# Altium PCB LuxLogger_V2_pcb.PcbDoc
Units mm, origin at the board's own origin, x right, y up, seen from the top; angles counter-clockwise.
Board outline 40 x 34 mm, 4 copper layers (Layer 1, Layer 2 - GND, Layer 3 - PWR, Layer 4), stack 1.57 mm thick; 83 components, 57 nets, 262 pads, 111 vias.
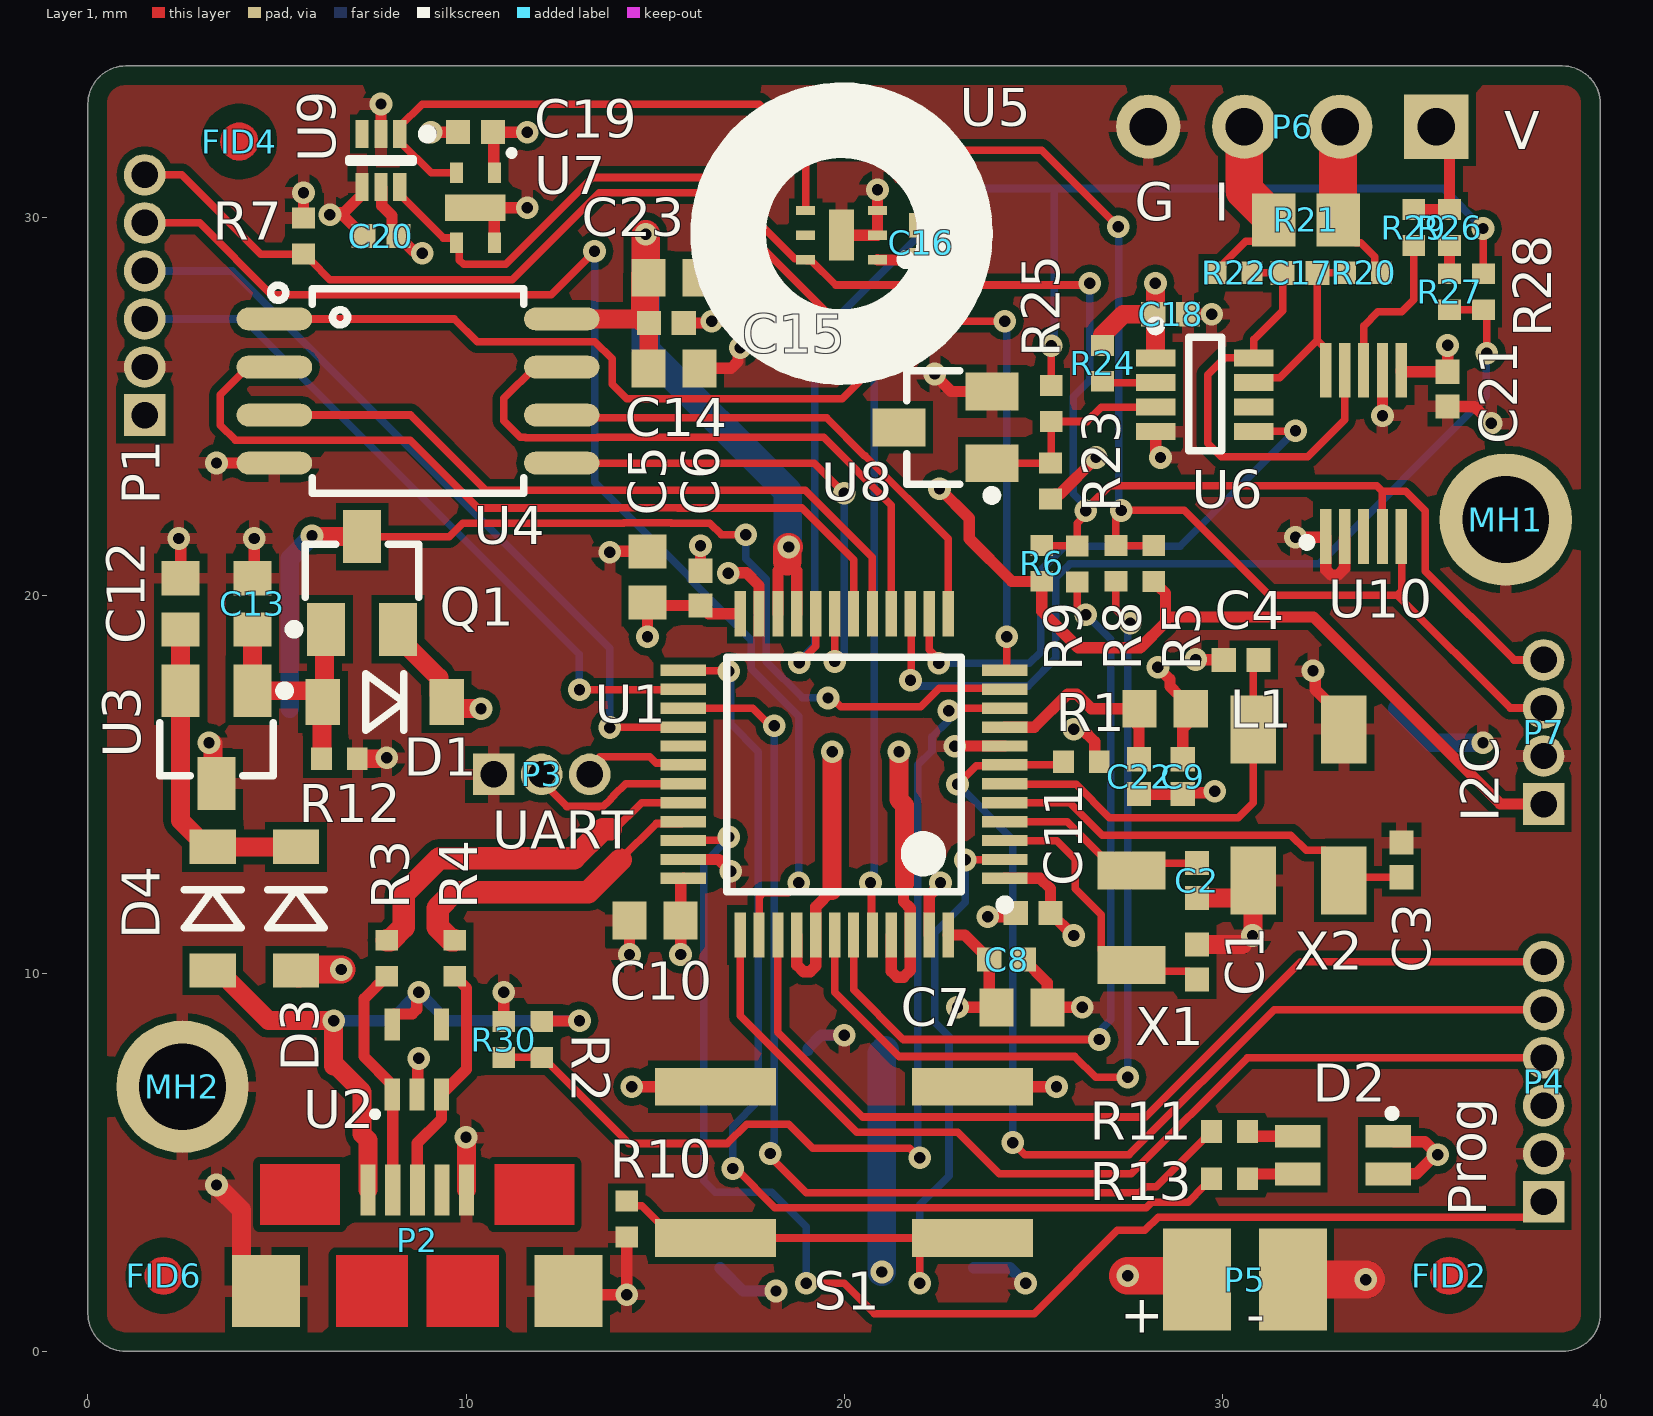
[diagram p0: Layer 1 view]
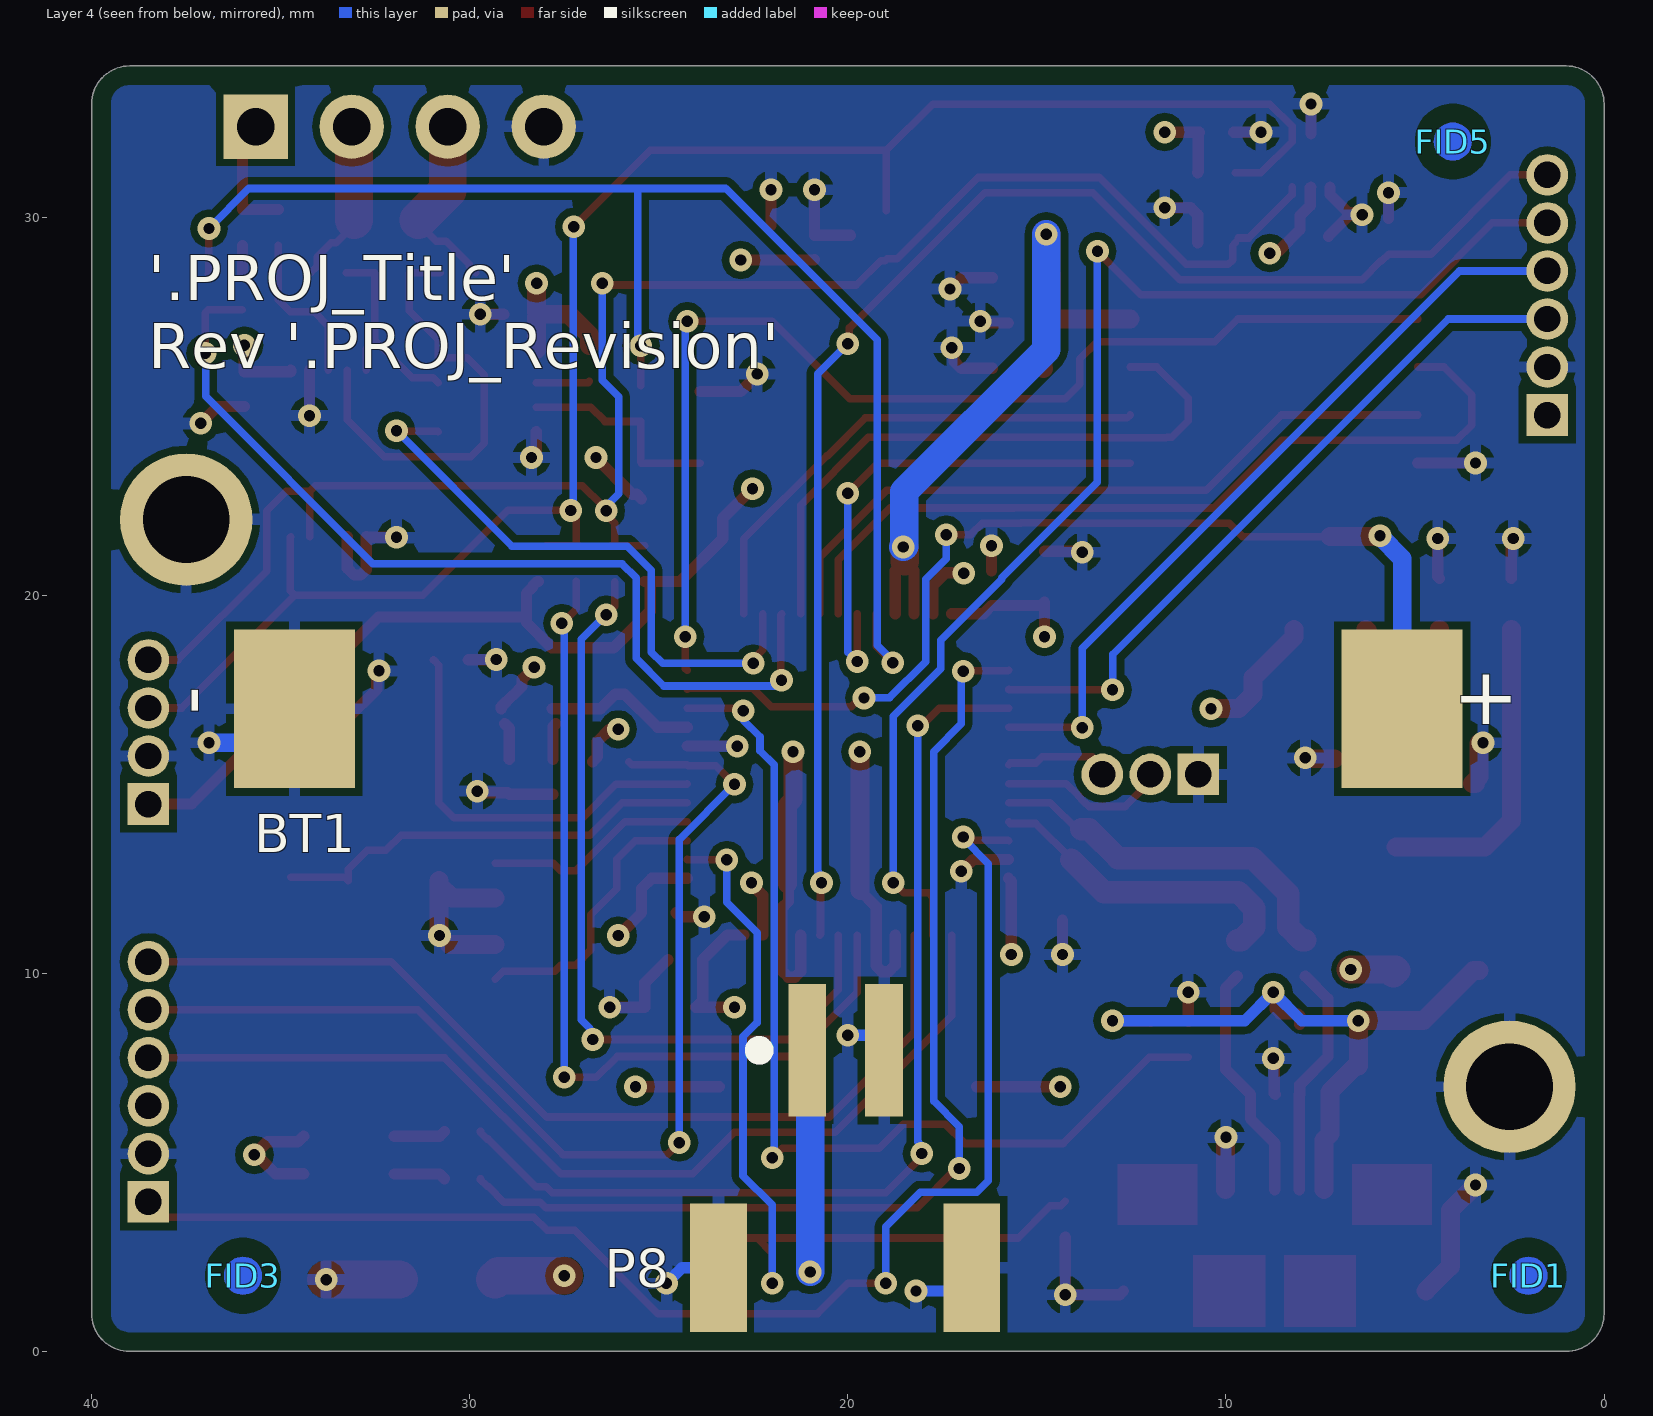
[diagram p1: Layer 4 view, seen from below]
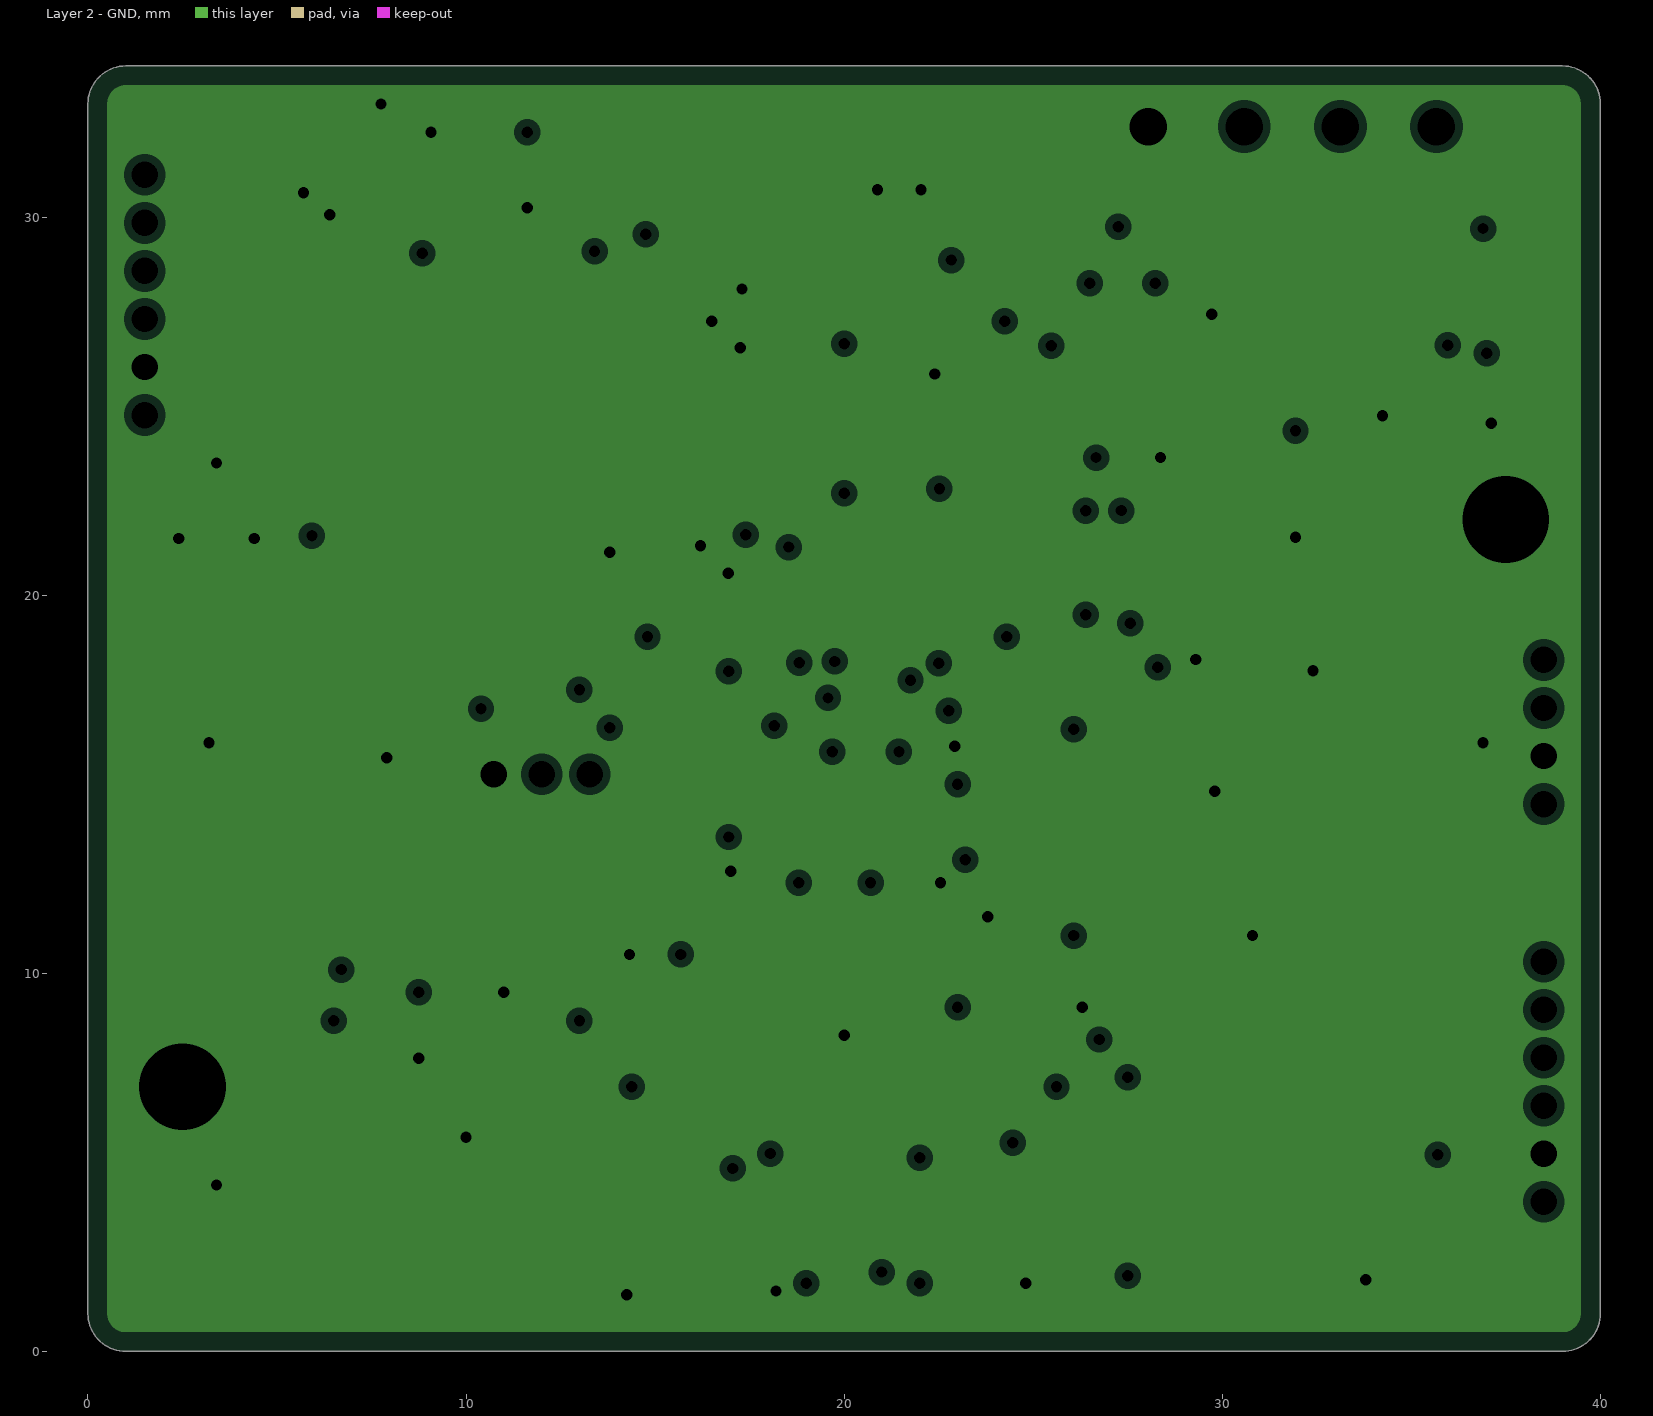
[diagram p2: Layer 2 - GND, clearances drawn from the general rule]
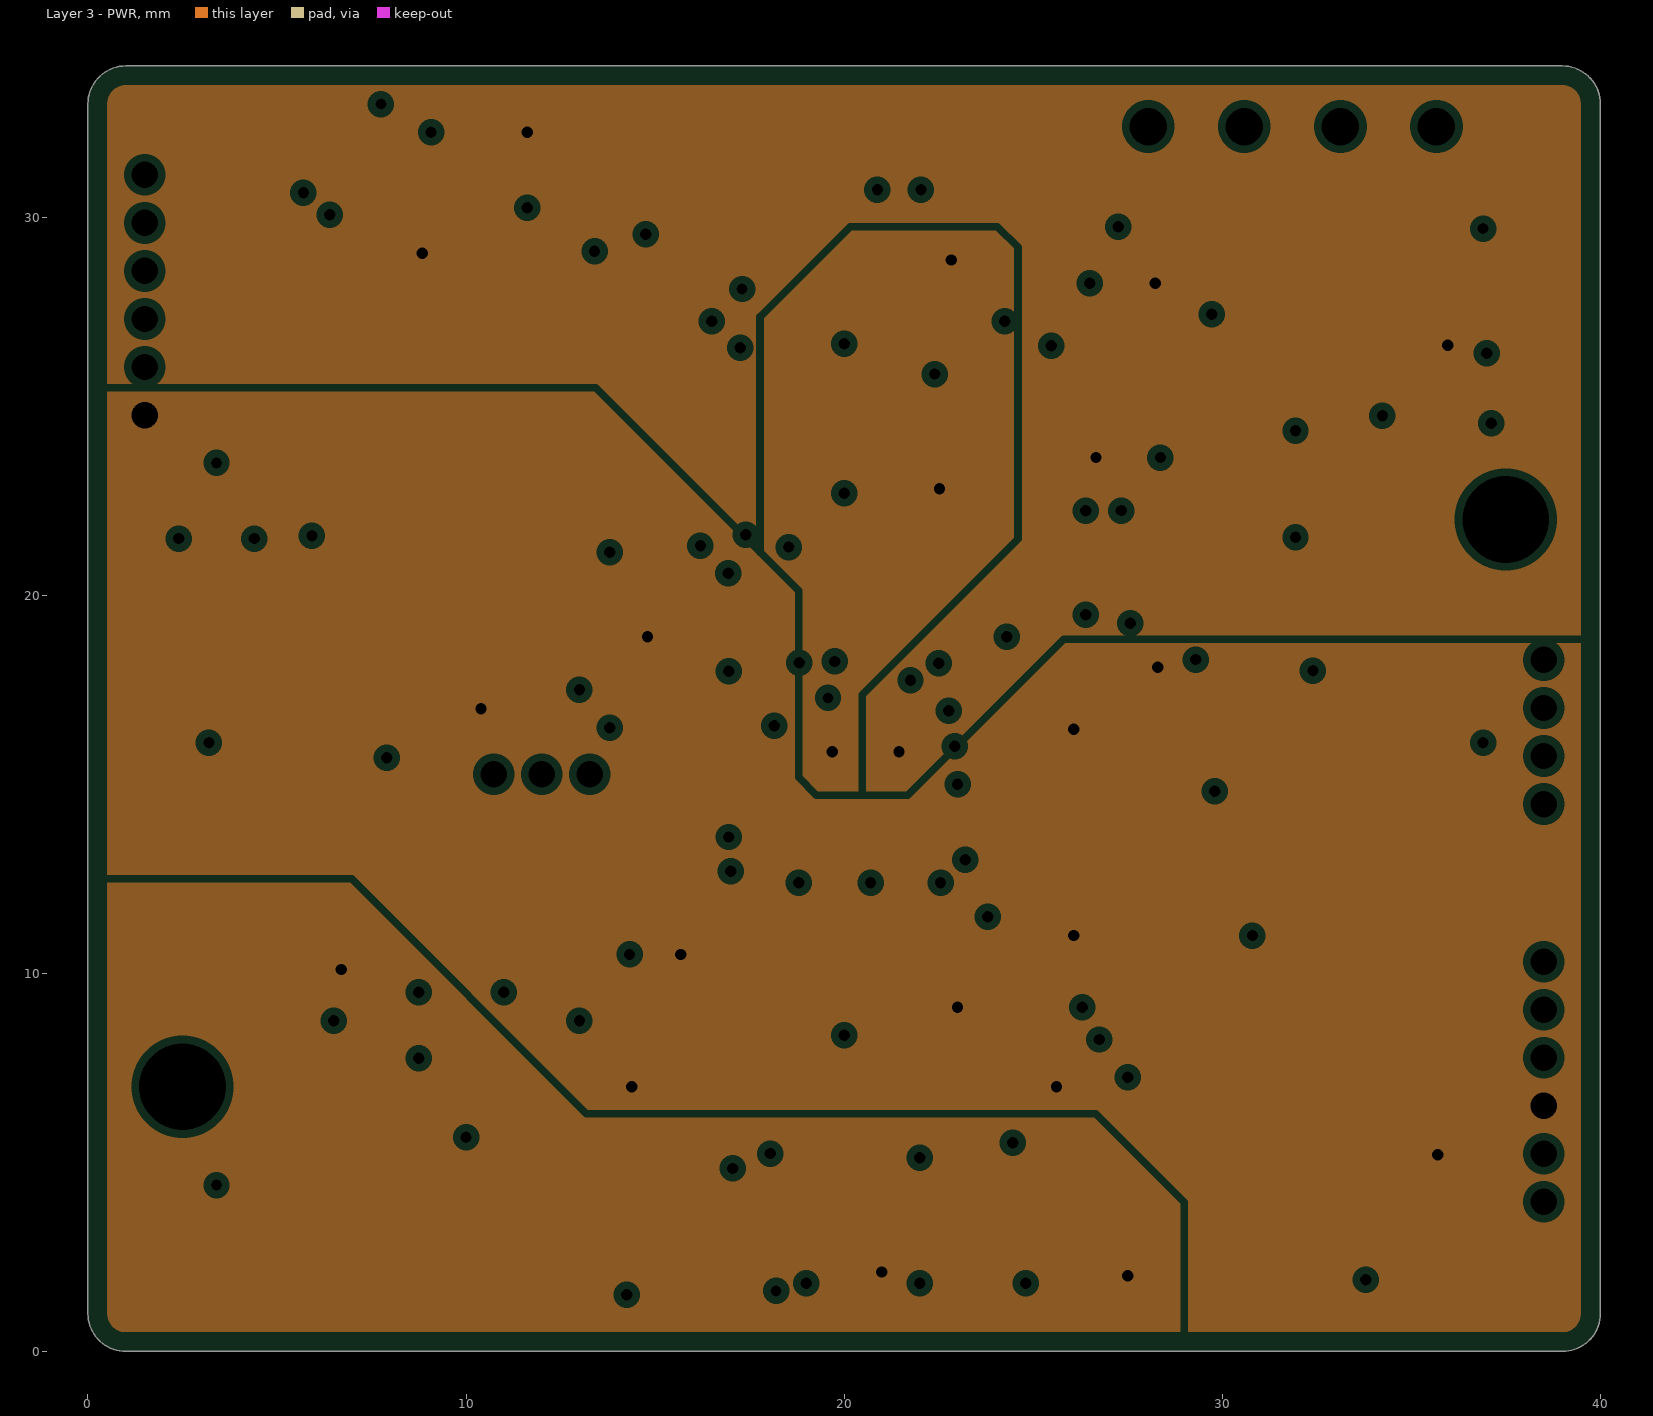
[diagram p3: Layer 3 - PWR, clearances drawn from the general rule]

## Layer stack, top to bottom
Top Solder: solder mask 0.01, Solder Resist, Dk 3.5
Layer 1: signal copper 0.035
Dielectric 1: core 0.36, FR-4, Dk 4.8
Layer 2 - GND: plane copper 0.035, net GND
Dielectric 3: prepreg 0.71, Dk 4.2
Layer 3 - PWR: plane copper 0.035, net (Multiple Nets)
Dielectric 4: core 0.36, Dk 4.2
Layer 4: signal copper 0.035
Bottom Solder: solder mask 0.01, Solder Resist, Dk 3.5

## Board outline
1,0 cw(c1,1) 0,1 0,33 cw(c1,33) 1,34 39,34 cw(c39,33) 40,33 40,1 cw(c39,1) 39,0

## Design rules (kind name [scope] priority, off if disabled: settings)
BoardOutlineClearance "BoardOutlineClearance inner layers" [OnLayer('Layer 2 - GND') OR OnLayer('Layer 3 - PWR')] p1: gap=0.4 ignorepadtopadclearanceinfootprint=FALSE
BoardOutlineClearance [OnLayer('Layer 1') OR OnLayer('Layer 4')] p2: gap=0.5 ignorepadtopadclearanceinfootprint=FALSE
Clearance "Clearance tmp112" [HasFootprint('SOTFL50P160X60-6N')] p1: gap=0.15 ignorepadtopadclearanceinfootprint=FALSE
Clearance "Clearance outer layers" [OnLayer('Layer 1') OR OnLayer('Layer 4')] p2: gap=0.2 ignorepadtopadclearanceinfootprint=FALSE
Clearance "Clearance inner layers" [OnLayer('Layer 2') OR OnLayer('Layer 3')] p3: gap=0.2 ignorepadtopadclearanceinfootprint=FALSE
ComponentClearance "ComponentClearance power options" [HasFootprint('BU2032SM-HD-G') vs HasFootprint('JST_S2B-PH-SM4-TB') OR HasFootprint('SOD123 SODFL360X130-2N')] p1: gap=0 collisioncheckmode=3 verticalgap=0 showdistances=FALSE
ComponentClearance "ComponentClearance power options_1" [All vs HasFootprint('HOLE_PLATED_2900um')] p2: gap=0 collisioncheckmode=3 verticalgap=0 showdistances=FALSE
ComponentClearance "ComponentClearance FID" [HasFootprint('FIDUCIAL_01')] p3: gap=0 collisioncheckmode=3 verticalgap=0 showdistances=FALSE
ComponentClearance [All] p4: gap=0.2 collisioncheckmode=3 verticalgap=2540 showdistances=FALSE
DiffPairsRouting "DiffPairsRouting USB 90R diff" [InDifferentialPair('USB')] p1: maxlimit=0.3 minlimit=0.15 mostfreqgap=0.3 toplayer_minwidth=0.2 toplayer_maxwidth=0.6 toplayer_prefwidth=0.6 bottomlayer_minwidth=0.2 bottomlayer_maxwidth=0.6 bottomlayer_prefwidth=0.6 maxuncoupledlength=12.7
HoleSize [All] p1: absolutevalues=TRUE maxlimit=4 minlimit=0.3 maxpercent=80.000 minpercent=20.000
PlaneClearance [All] p1: clearance=0.2
PlaneConnect [All] p1: planeconnectstyle=Direct reliefexpansion=0.508 reliefentries=4 reliefconductorwidth=0.254 reliefairgap=0.254
PolygonConnect [All] p1: connectstyle=Relief reliefconductorwidth=0.3 reliefentries=4 polygonreliefangle="90 Angle" airgapwidth=0.2
RoutingVias [All] p1: holewidth=0.3 width=0.6 viastyle="Through Hole" minholewidth=0.3 minwidth=0.6 maxholewidth=0.5 maxwidth=1
SolderMaskExpansion [All] p1: expansion=0.102 istentingtop=FALSE
UnRoutedNet [All] p1: checkbadconnections=TRUE
Width [All] p1: maxlimit=2 minlimit=0.2 preferedwidth=0.2 minimp=50.000000 maximp=50.000000 favimp=50.000000
24 further rules are at their usual default settings.

## Classes and differential pairs
differential pair USB: +USB_P -USB_N

## Components (designator, comment, footprint, x,y, rotation, side; value= is the part's Value field where it differs from the comment)
BT1 "" BU2032SM-HD-G 5.339,17 r0 bottom
C1 "" CAP0402 29.33,10.3 r270 top
C2 "" CAP0402 29.33,12.455 r90 top
C3 "" CAP0402 34.739,13 r270 top
C4 "" CAP0402 30.5,18.288 r0 top
C5 "" CAP0603 14.8,20.488 r270 top
C6 "" CAP0402 16.2,20.188 r270 top
C7 "" CAP0603 24.7,9.1 r180 top
C8 "" CAP0402 24.3,10.363 r180 top
C9 "" CAP0402 28.959,15.2 r90 top
C10 "" CAP0603 15,11.4 r0 top
C11 "" CAP0402 25,11.6 r0 top
C12 "" CAP0603 2.452,19.775 r270 top
C13 "" CAP0603 4.352,19.775 r270 top
C14 "" CAP0603 15.5,26 r180 top
C15 "" CAP0402 15.3,27.2 r180 top
C16 "" CAP0402 22.032,29.326 r270 top
C17 "" CAP0402 32.057,28.526 r0 top
C18 "" CAP0402 28.636,27.433 r180 top
C19 "" CAP0402 10.25,32.25 r0 top
C20 "" CAP0402 7.75,29.5 r0 top
C21 "" CAP0402 35.962,25.452 r90 top
C22 "" CAP0402 27.8,15.2 r90 top
C23 "" CAP0603 15.5,28.4 r180 top
D1 "" "SOD123 SODFL360X130-2N" 7.85,17.175 r0 top
D2 "LED_RG" KPTBD-3216SURKCGKC 31.994,5.694 r0 top
D3 "" "SOD123 SODFL360X130-2N" 5.5,11.709 r90 top
D4 "" "SOD123 SODFL360X130-2N" 3.3,11.709 r90 top
FID1 "Fiducial" FIDUCIAL_02_small 2,2 r180 bottom
FID2 "Fiducial" FIDUCIAL_02_small 36,2 r0 top
FID3 "Fiducial" FIDUCIAL_02_small 36,2 r180 bottom
FID4 "Fiducial" FIDUCIAL_02_small 4,32 r0 top
FID5 "Fiducial" FIDUCIAL_02_small 4,32 r180 bottom
FID6 "Fiducial" FIDUCIAL_02_small 2,2 r0 top
L1 "" CAP0603 28.494,17 r180 top
MH1 "Mounting hole" HOLE_PLATED_2300um 37.5,22 r0 top
MH2 "Mounting hole" HOLE_PLATED_2300um 2.5,7 r0 top
P1 "" "Header 1x6 1.27" 1.5,24.767 r90 top
P2 "ZX62-B-5PA(33)" ZX62-B-5PA(33) 8.712,1.6 r0 top
P3 "" "Header 1x3 1.27" 10.73,15.263 r0 top
P4 "" "Header 1x6 1.27" 38.5,3.96 r90 top
P5 "SMT pads" "2x1 blank pads_2" 30.6,1.9 r0 top
P6 "" "HEADER 1X4 2.54" 31.854,32.394 r180 top
P7 "" "Header 1x4 1.27" 38.5,14.478 r90 top
P8 "" JST_S2B-PH-SM4-TB 21.075,7.963 r0 bottom
Q1 "" SOT23-3 7.25,20.475 r90 top
R1 "" RES0402 26.275,15.6 r0 top
R2 "" RES0402 12,8.25 r90 top
R3 "" RES0402 7.9,10.4 r270 top
R4 "" RES0402 9.7,10.4 r270 top
R5 "" RES0402 28.194,20.838 r270 top
R6 "" RES0402 25.227,20.843 r270 top
R7 "" RES0402 5.7,29.5 r270 top
R8 "" RES0402 27.19,20.843 r270 top
R9 "" RES0402 26.168,20.825 r270 top
R10 "" RES0402 14.25,3.5 r90 top
R11 "" RES0402 30.192,5.818 r180 top
R12 "" RES0402 6.65,15.675 r180 top
R13 "" RES0402 30.192,4.568 r180 top
R20 "" RES0402 33.739,28.526 r180 top
R21 "" RES0805 32.214,29.926 r180 top
R22 "" RES0402 30.314,28.526 r0 top
R23 "" RES0402 25.459,23.021 r90 top
R24 "" RES0402 26.836,26.133 r90 top
R25 "" RES0402 25.476,25.072 r90 top
R26 "" RES0402 36.014,29.726 r270 top
R27 "" RES0402 36.014,28.026 r270 top
R28 "" RES0402 36.914,28.026 r90 top
R29 "" RES0402 35.068,29.726 r270 top
R30 "" RES0402 11,8.25 r270 top
S1 "SW_EVQQ2" EVQQ2W02W 23.4,7 r180 top
U1 "" TSQFP50P900X900X160-48N 20,15.263 r180 top
U2 "RClamp0503F" "SC-70 5L" 8.05,6.8 r0 top
U3 "" SOT23-3 3.4,16.1 r270 top
U4 "MX25R6435F_SO8" SO_8_W 8.731,25.402 r0 top
U5 "OPT3001" OPT3001 20.882,28.876 r180 top
U6 "INA190" SOT23-8 29.614,25.326 r0 top
U7 "SHTC3" SHTC3 10.75,31.175 r180 top
U8 "" SOT23-3 22.532,24.44 r180 top
U9 "" SOTFL50P160X60-6N 7.75,31.5 r270 top
U10 "INA226" VSSOP-10 33.739,23.65 r90 top
X1 "" FC-135 27.6,10.218 r90 top
X2 "" ABM3B 32.018,14.455 r90 top

## Footprints (in the part's own frame and the unit in brackets; to place one, negate y for a bottom-side part, rotate by r counter-clockwise, add the part's x,y. Pads: shape width x height; smd on the part's side, far side on the other; paste and mask are expansions set on the pad)
"2x1 blank pads_2" [mm] "2x1 blank pads"
  rect 1.8x2.7 smd: 1(-1.27,0) 2(1.27,0)
ABM3B [mm]
  rect 1.8x1.2 smd: 1(-2,-1.2) 2(2,-1.2) 3(2,1.2) 4(-2,1.2)
  body extent -2.5,-1.6 2.5,1.6, height 1.1
BU2032SM-HD-G [mm] "CR2032 battery holder"
  rect 3.2x4.2 smd: 1(0,0) 2(29.3,0)
  body extent -1.4,-10.05 30.6,9.95, height 5.3
CAP0402 [mm] "Chip Capacitor, 2-Leads, Body 1,00x0,50mm, IPC Medium Density"
  rect 0.64x0.64 smd: 1(-0.46,0) 2(0.46,0)
  body extent -0.55,-0.3 0.55,0.3, height 0.6
CAP0603 [mm] "Chip Capacitor, 2-Leads, Body 1,60x0,80mm, IPC Medium Density"
  rect 0.9x1 smd: 1(-0.675,0) 2(0.675,0)
  body extent -0.87,-0.48 0.87,0.47, height 0.85
EVQQ2W02W [mm] "Switch"
  rect 3.2x1 smd: 1(0,0) 2(6.8,0) 3(6.8,4) 4(0,4)
  body extent 0,-1 6.5,5, height 2.5
FC-135 [mm] "Epson crystal"
  rect 1x1.8 smd: 1(0,0) 2(2.5,0)
  body extent -0.35,-0.75 2.85,0.75, height 0.8
FIDUCIAL_02_small [mm]
  Layer 1 region: 0,-0.5 -0.191,-0.462 -0.354,-0.354 -0.462,-0.191 -0.5,0 -0.5,0 -0.462,0.191 -0.354,0.354 -0.191,0.462 0,0.5 0,0.5 0.191,0.462 0.354,0.354 0.462,0.191 0.5,0 0.5,0 0.462,-0.191 0.354,-0.354 0.191,-0.462 0,-0.5
  Layer 1 pour cut-out: 0,-1 -0.383,-0.924 -0.707,-0.707 -0.924,-0.383 -1,0 -1,0 -0.924,0.383 -0.707,0.707 -0.383,0.924 0,1 0,1 0.383,0.924 0.707,0.707 0.924,0.383 1,0 1,0 0.924,-0.383 0.707,-0.707 0.383,-0.924 0,-1
"Header 1x3 1.27" [mm] "Header 1x3x1.27"
  rect 1.1x1.1 hole 0.7: 1(0,0)
  round 1.1 hole 0.7: 2(1.27,0) 3(2.54,0)
"Header 1x4 1.27" [mm] "Header 1x4x1.27"
  rect 1.1x1.1 hole 0.7: 1(0,0)
  round 1.1 hole 0.7: 2(1.27,0) 3(2.54,0) 4(3.81,0)
"HEADER 1X4 2.54" [mm] "Header 1x4x2.54"
  rect 1.7x1.7 hole 1: 1(-3.81,0)
  round 1.7 hole 1: 2(-1.27,0) 3(1.27,0) 4(3.81,0)
"Header 1x6 1.27" [mm] "Header 1x6x1.27"
  rect 1.1x1.1 hole 0.7: 1(0,0)
  round 1.1 hole 0.7: 2(1.27,0) 3(2.54,0) 4(3.81,0) 5(5.08,0) 6(6.35,0)
HOLE_PLATED_2300um [mm] "Mounting hole for M2.5"
  round 3.5 hole 2.3: 1(0,0)
JST_S2B-PH-SM4-TB [mm] "JST 2 pin 2 mm horisontal"
  rect 1x3.5 smd: 1(0,0) 2(-2.032,0)
  rect 1.5x3.4 smd: 3(2.35,5.75) 4(-4.35,5.75)
  silkscreen extent 1.09,-0.18 1.45,0.18, body extent -4.97,-1.49 2.93,7.11, height 5.5
KPTBD-3216SURKCGKC [mm] "Kingbright red/green LED"
  rect 1.2x0.6 smd: 1(2.4,0) 2(0,0) 3(2.4,-1) 4(0,-1)
  silkscreen extent 2.4,0.5 2.6,0.7, body extent -0.4,-1.3 2.8,0.3, height 1.8
OPT3001 [mm] "Lux sensor"
  rect 0.5x0.25 smd: 1(0,0) 2(0,-0.65) 3(0,-1.3) 4(1.9,-1.3) 5(1.9,-0.65) 6(1.9,0)
  rect 0.65x1.35 smd: 7(0.95,-0.65)
  silkscreen extent -0.88,-0.12 -0.63,0.12, body extent -0.05,-1.65 1.95,0.35, height 0.62
RES0402 [mm] "Chip Resistor, 2-Leads, Body 1,05x0,54mm, IPC Medium Density"
  rect 0.55x0.6 smd: 1(-0.475,0) 2(0.475,0)
  body extent -0.55,-0.3 0.55,0.3, height 0.4
RES0805 [mm] "Chip Resistor, 2-Leads, Body 2,00x1,25mm, IPC Medium Density"
  rect 1.15x1.4 smd: 1(-0.85,0) 2(0.85,0)
  body extent -1.08,-0.7 1.07,0.7, height 0.65
"SC-70 5L" [mm]
  rect 0.4x0.85 smd: 1(0,0) 2(0.65,0) 3(1.3,0) 4(1.3,1.85) 5(0,1.85)
  silkscreen extent -0.51,-0.58 -0.4,-0.47, body extent -0.45,0.25 1.75,1.6, height 1.1
SHTC3 [mm]
  rect 0.35x0.55 smd: 1(0,0) 2(1,0) 3(1,1.85) 4(0,1.85)
  rect 1.6x0.7 smd: 5(0.5,0.925)
  silkscreen extent -0.51,-0.58 -0.4,-0.47, body extent -0.5,-0.07 1.5,1.93, height 0.75
SO_8_W [mm]
  oval 2x0.6 smd: 1(-3.8,1.905) 2(-3.8,0.635) 3(-3.8,-0.635) 4(-3.8,-1.905) 5(3.8,-1.905) 6(3.8,-0.635) 7(3.8,0.635) 8(3.8,1.905)
  silkscreen extent -3.9,-2.7 2.8,2.8, body extent -4.05,-2.73 4.05,2.73, height 1.75
"SOD123 SODFL360X130-2N" [mm] "SODFL, 2-Leads, Body 1,60x3,60mm, IPC Medium Density"
  rect 0.91x1.22 smd: 1(-1.635,0) 2(1.635,0)
  silkscreen extent -0.5,-0.75 0.5,0.75, body extent -1.4,-0.85 1.4,0.85, height 1.3
SOT23-3 [mm] "SOT23, 3-Leads, Body 2,90x2,80mm, Pitch 0,95mm, IPC Medium Density"
  rect 1.4x1 smd: 1(-1.375,0.95) 2(-1.375,-0.95) 3(1.075,0)
  silkscreen extent -1.5,-1.5 0.87,1.92, body extent -1.7,-1.5 1.3,1.5, height 1.1
SOT23-8 [mm] "SOT23, 8-Leads"
  rect 1.05x0.45 smd: 1(-1.375,0.95) 2(-1.375,0.3) 3(-1.375,-0.35) 4(-1.375,-1) 5(1.225,-1) 6(1.225,-0.35) 7(1.225,0.3) 8(1.225,0.95)
  silkscreen extent -1.5,-1.5 0.38,1.92, body extent -0.92,-1.42 0.73,1.53, height 1.1
SOTFL50P160X60-6N [mm] "SOTFL, 6-Leads, Body 1,60x1,60mm, Pitch 0,50mm, IPC Medium Density"
  rect 0.75x0.35 smd: 1(-0.7,0.5) 2(-0.7,0) 3(-0.7,-0.5) 4(0.7,-0.5) 5(0.7,0) 6(0.7,0.5)
  silkscreen extent -0.82,-0.85 0.05,1.35, body extent -0.85,-0.85 0.85,0.85, height 0.6
TSQFP50P900X900X160-48N [mm] "TSQFP, 48-Leads, Body 7,00x7,00mm, Pitch 0,50mm, IPC Medium Density"
  rect 1.2x0.3 smd: 1(-4.25,2.75) 2(-4.25,2.25) 3(-4.25,1.75) 4(-4.25,1.25) 5(-4.25,0.75) 6(-4.25,0.25) 7(-4.25,-0.25) 8(-4.25,-0.75) 9(-4.25,-1.25) 10(-4.25,-1.75) 11(-4.25,-2.25) 12(-4.25,-2.75) 25(4.25,-2.75) 26(4.25,-2.25) 27(4.25,-1.75) 28(4.25,-1.25) 29(4.25,-0.75) 30(4.25,-0.25) 31(4.25,0.25) 32(4.25,0.75) 33(4.25,1.25) 34(4.25,1.75) 35(4.25,2.25) 36(4.25,2.75)
  rect 0.3x1.2 smd: 13(-2.75,-4.25) 14(-2.25,-4.25) 15(-1.75,-4.25) 16(-1.25,-4.25) 17(-0.75,-4.25) 18(-0.25,-4.25) 19(0.25,-4.25) 20(0.75,-4.25) 21(1.25,-4.25) 22(1.75,-4.25) 23(2.25,-4.25) 24(2.75,-4.25) 37(2.75,4.25) 38(2.25,4.25) 39(1.75,4.25) 40(1.25,4.25) 41(0.75,4.25) 42(0.25,4.25) 43(-0.25,4.25) 44(-0.75,4.25) 45(-1.25,4.25) 46(-1.75,4.25) 47(-2.25,4.25) 48(-2.75,4.25)
  silkscreen extent -4.38,-3.1 3.1,3.57, body extent -3.5,-3.5 3.5,3.5, height 1.6
VSSOP-10 [mm]
  rect 1.45x0.3 smd: 1(-2.1,1) 2(-2.1,0.5) 3(-2.1,0) 4(-2.1,-0.5) 5(-2.1,-1) 6(2.3,-1) 7(2.3,-0.5) 8(2.3,0) 9(2.3,0.5) 10(2.3,1)
  silkscreen extent -2.35,1.4 -2.15,1.6, body extent -2.35,-1.5 2.55,1.5, height 1.15
ZX62-B-5PA(33) [mm] "USB Micro B"
  rect 0.4x1.35 smd: 1(-1.3,2.675) 2(-0.65,2.675) 3(0,2.675) 4(0.65,2.675) 5(1.3,2.675)
  rect 1.8x1.9 smd: 6(-4,0) 7(4,0)
  Layer 1 region: 0.25,0.95 2.15,0.95 2.15,-0.95 0.25,-0.95
  Layer 1 region: -2.15,0.95 -0.25,0.95 -0.25,-0.95 -2.15,-0.95
  Layer 1 region: -4.15,3.35 -2.05,3.35 -2.05,1.75 -4.15,1.75
  Layer 1 region: 2.05,3.35 4.15,3.35 4.15,1.75 2.05,1.75
  body extent -4.04,-2.68 4.04,2.92, height 2.75

## Part data
BT1: library part Battery, "CR2032 holder", Manufacturer=MPD, Manufacturer PN=BU2032SM-HD-G, Package=SMD, Specification=BU2032SM-HD-G
C1 C2 C3 C4 C6 C8 C9 C11 C15 C16 C17 C18 C19 C20 C21 C22: library part Cap, "Capacitor", Package=0402
  C1 C2: Specification=12.5p/10V
  C3 C4: Specification=18p/10V
  C6 C8 C9 C11 C15 C16 C17 C18 C19 C20 C21 C22: Specification=100n/10V
C5 C7 C10 C12 C13 C14 C23: library part Cap, "Capacitor", Package=0603
  C5 C7 C10 C12 C13: Specification=10µ/10V
  C14 C23: Specification=1µ/10V
D1 D3 D4: library part "D Schottky", "Schottky Diode", Manufacturer=NEXPERIA, Manufacturer PN=BAT54GW, Package=SOD123, Specification=BAT54GW
D2: Manufacturer=KINGBRIGHT, Manufacturer PN=KPTBD-3216SURKCGKC, Package=SMD, Specification=KPTBD-3216SURKCGKC
L1: library part Inductor, "Inductor", Manufacturer=MURATA, Manufacturer PN=BLM18AG601SN1D, Package=0603, Specification="600R 0.5A"
P1 P4: library part "Header 6", "Header, 6-Pin", Package=Hole, Specification="1.27 pitch"
P2: "USB Connector", Manufacturer=Hirose, Package=SMD, Manufacturer PN=ZX62-B-5PA(33), Specification=ZX62-B-5PA(33)
P3: library part "Header 3", "Header, 3-Pin", Package=Hole, Specification="1.27 pitch"
P5: library part "Header 2", "Header, 2-Pin", LatestRevisionDate=17-Jul-2002, LatestRevisionNote="Re-released for DXP Platform.", Publisher="Altium Limited"
P6 P7: library part "Header 4", "Header, 4-Pin", Package=Hole, Specification="2.54 pitch"
P8: library part "Header 2+2 Mech", "Header, 2-Pin, 2 mech pins", Manufacturer=JST, Manufacturer PN=S2B-PH-SM4-TB(LF)(SN), Package=SMD, Specification=S2B-PH-SM4-TB
Q1: library part MOSFET-P, "P-Channel MOSFET", Manufacturer=ON, Manufacturer PN=FDN342P, Package=SOT-23, Specification=FDN342P
R1 R2 R3 R4 R5 R6 R7 R8 R9 R10 R11 R12 R13 R20 R22 R23 R24 R25 R26 R27 R28 R29 R30: library part Res2, "Resistor", Package=0402
  R1 R2 R7 R10 R12 R30: Specification=10k
  R3 R4 R8 R9 R24: Specification=0R
  R5 R6: Specification=4k7
  R11 R13: Specification=270R
  R20 R22: Specification=5R
  R23 R25 R27 R28: Specification="100k 0.1%"
  R26: Specification="10k 0.1%"
  R29: Specification=10R
R21: library part Res2, "Resistor", Package=0805, Specification="2R 0.1%"
S1: "Switch", Manufacturer=PANASONIC, Manufacturer PN=EVQQ2W02W, Package=SMD, Specification=EVQQ2W02W
U1: library part STM32L412CB_2, Manufacturer=ST, Manufacturer PN=STM32L412CBT6, Package=LQFP-48, Specification=STM32L412CBT6
U2: "TVS array USB", Manufacturer=SEMTECH, Manufacturer PN=RClamp0503F.TCT, Package=SC70-5L, Specification=RClamp0503F
U3: library part MCP1810TxxxTT, "3V3 LDO low iq", Manufacturer=MICROCHIP, Manufacturer PN=MCP1810T33ITT, Package=SOT23, Specification=MCP1810T33ITT
U4: "ULTRA LOW POWER, 64M-BIT FLASH MEMORY", Manufacturer=Macronix, Manufacturer PN=MX25R6435F, Package=SOIC-8, Specification=MX25R6435F
U5: "Lux sensor", Manufacturer=TI, Manufacturer PN=OPT3001DNP, Package=DNP-6, Specification=OPT3001
U6: "Current amplifier", Manufacturer=TI, Manufacturer PN=INA190A1IDDF, Package=SOT23-8, Specification=INA190A1
U7: "SHTC3 RH sensor", Manufacturer=SENSIRION, Package=DFN, Manufacturer PN=SHTC3, Specification=SHTC3
U8: library part TS4061, "Shunt voltage reference", Manufacturer=ST, Manufacturer PN=TS4061BILT-1.225, Package=SOT23-3L, Specification=TS4061BILT-1.225
U9: library part TMP112A, "Temp_Sensor", Manufacturer=TI, Package=SOT-563, Manufacturer PN=TMP112A, Specification=TMP112
U10: "Current and power monitor", Manufacturer=TI, Manufacturer PN=INA226AIDGS, Package=VSSOP10
X1: "32.768 kHz Crystal", Manufacturer=EPSON, Manufacturer PN="FC-135 32.7680KA-A5", Package=SMD, Specification="32.768 kHz"
X2: "Crystal", Manufacturer=ABRACON, Manufacturer PN=ABM3B-8.000MHZ-B2-T, Package=SMD, Specification="8 MHz"

## Via types
v1: diameter 0.6, hole 0.3, Layer 1 to Layer 4, tented both sides, 111 vias

## Nets (pads, with @x,y where several pads share a name; then routed paths per layer and width w, separated by ;. In a path a pad name is that pad's centre, name@x,y a point inside that pad or via, vN(x,y) a via of type N, cw(c..) or ccw(c..) an arc to the next point about the centre after c; other vN are vias at no path point)
5V_USB: D4.1 P2.1 R2.2 U2.5 | length 18.2
  Layer 1 w0.3: U2.5 8.05,8.875 8.1,8.925 8.574,8.925 8.693,9.043 8.693,9.443 v1(8.75,9.5) ; R2.2 12.013,8.738 12.988,8.738 v1(13,8.75)
  Layer 1 w0.5: D4.1 3.455,10.074 4.779,8.75 v1(6.5,8.75) 6.5,7.616 ; 6.5,7.55 6.5,7.616 ; P2.1 7.412,5.588 7.25,5.75 7.25,6.866 6.5,7.616
  Layer 4 w0.3: v1(6.5,8.75) 8,8.75 v1(8.75,9.5) 9.5,8.75 v1(13,8.75)
ACTIVATE_IV_MEASn: R25.2 R28.2 U1.20 | length 36.4
  Layer 1 w0.2: v1(18.816,18.216) 19.25,18.65 U1.20 ; R25.2 25.476,26.576 v1(25.476,26.6) ; v1(36.9,29.7) 36.9,28.515 R28.2
  Layer 4 w0.2: v1(18.816,18.216) 18.816,18.265 19.229,18.677 19.229,26.752 23.236,30.759 25.558,30.759 ; v1(25.476,26.6) 25.558,26.682 25.558,30.759 ; v1(36.9,29.7) 35.841,30.759 25.558,30.759
BAT_MEAS: BT1.1 Q1.3 U1.11 | length 27.2
  Layer 1 w0.2: Q1.3 9.55,21.55 9.909,21.909 14.171,21.909 14.176,21.913 15.424,21.913 15.429,21.909 16.449,21.909 16.757,21.6 v1(17.4,21.6) ; v1(19.574,17.284) 19.682,17.284 19.916,17.05 22.028,17.05 22.523,17.545 24.218,17.545 U1.11
  Layer 1 w0.5: v1(5.925,21.575) 5.95,21.55 Q1.3
  Layer 4 w0.2: v1(17.4,21.6) 17.4,20.968 17.942,20.427 17.942,18.242 18.9,17.284 v1(19.574,17.284)
  Layer 4 w0.5: BT1.1 5.339,20.968 5.925,21.555 v1(5.925,21.575)
BUTTON: R10.2 S1.3 S1.4 U1.2 | length 24.2
  Layer 1 w0.2: R10.2 14.375,3.85 14.65,3.85 15.5,3 S1.3 S1.4@22.4,3 ; v1(22,1.8) 22,2.6 S1.4@22.4,3 ; v1(23.2,13) 23.202,13 23.255,13.053 23.302,13.006 24.244,13.006 U1.2 ; S1.4@23.5,3.1 S1.4 S1.4@22.4,3
  Layer 4 w0.2: v1(22,1.8) 22,3.875 22.775,4.65 22.775,8.325 22.4,8.7 22.4,11.078 23.2,11.878 v1(23.2,13)
EXT_BAT: D3.1 P5.1 P8.1 | length 9.1
  Layer 1 w0.75: D3.1@5.58,9.994 D3.1 5.526,10.1 v1(6.7,10.1)
  Layer 1 w1: v1(27.5,2) 29.23,2 P5.1
  Layer 4 w0.75: v1(21,2.1) 21,7.888 P8.1
FLASH_CS: U1.12 U4.1 | length 30.7
  Layer 1 w0.2: U4.1 9.693,27.307 10.293,26.707 13.41,26.707 13.865,26.251 13.865,25.586 14.251,25.2 19.95,25.2 22,27.25 v1(24.25,27.25) ; U1.12 24.3,18.063 v1(24.3,18.9)
  Layer 4 w0.2: v1(24.25,27.25) 24.3,27.2 v1(24.3,18.9)
FLASH_SCLK: U1.13 U4.6 | length 13.6
  Layer 1 w0.2: U4.6 12.608,24.69 19.534,24.69 20.534,23.69 20.553,23.69 22.75,21.493 U1.13
FLASH_SIO0: U1.19 U4.5 | length 13.6
  Layer 1 w0.2: U4.5 19.204,23.497 v1(20,22.701) ; v1(19.75,18.25) U1.19
  Layer 4 w0.2: v1(19.75,18.25) 20,18.5 v1(20,22.701)
FLASH_SIO1: U1.18 U4.2 | length 22.2
  Layer 1 w0.2: U4.2 4.231,26.037 3.5,25.306 3.5,24.5 3.903,24.097 8.528,24.097 10.316,22.309 14.006,22.309 14.01,22.313 15.59,22.313 15.594,22.309 18.878,22.309 20.25,20.937 U1.18
FLASH_SIO2: U1.17 U4.3 | length 18.9
  Layer 1 w0.2: U4.3 8.531,24.767 10.519,22.78 18.977,22.78 20.75,21.007 U1.17
FLASH_SIO3: U1.16 U4.7 | length 16.5
  Layer 1 w0.2: U4.7 11.831,26.037 11,25.206 11,24.617 11.439,24.179 11.571,24.179 11.583,24.167 13.48,24.167 13.491,24.179 19.456,24.179 21.25,22.385 U1.16
GND: BT1.2 C1.1 C2.1 C3.1 C4.1 C5.1 C6.1 C7.1 C8.1 C9.1 C10.1 C11.1 C12.1 C13.1 C14.1 C15.1 C16.1 C18.1 C19.1 C20.1 C21.1 C22.1 C23.1 MH1.1 MH2.1 P1.2 P2.5 P2.6 P2.7 P3.1 P4.2 P5.2 P6.4 P7.2 P8.2 P8.3 P8.4 R7.1 R10.1 R12.1 R30.1 U1.8 U1.23 U1.35 U1.47 U2.2 U3.3 U4.4 U5.2 U5.3 U5.7 U6.4 U7.4 U7.5 U8.2 U9.2 U9.4 U10.1 U10.2 U10.7 X2.2 X2.4 | length 66.3
  Layer 1 w0.3: v1(2.4,21.5) 2.452,21.448 C12.1 ; v1(3.4,23.5) 3.403,23.497 U4.4 ; v1@4.331,21.569 v1(4.4,21.5) 4.4,20.498 C13.1 ; R7.1 v1(5.7,30.65) ; v1(6.4,30.066) 6.457,30.123 6.773,30.123 7.25,30.6 U9.4 ; 6.782,30.008 C20.1 ; U9.2 v1(7.75,32.992) ; U2.2 8.725,6.825 8.725,7.725 v1(8.75,7.75) ; v1(9.075,32.25) C19.1 ; U7.4 10.75,30.066 10.934,30.25 v1(11.619,30.25) ; R30.1 v1(11,9.5) ; P2.7 12.812,1.5 v1(14.25,1.5) R10.1 ; v1(13.8,21.138) 13.825,21.163 C5.1 ; v1(14.325,10.5) C10.1 ; U1.35 16.686,13.013 v1(17,12.7) v1(17,12.7) ; C15.1 16.45,27.2 v1(16.5,27.25) ; C14.1 17.004,26 17.193,26.189 17.193,26.493 v1(17.25,26.55) ; C23.1 16.986,28.4 17.286,28.1 v1(17.3,28.1) ; C6.1 v1(16.2,21.309) ; v1(16.938,20.586) 16.945,20.593 17.414,20.593 17.75,20.258 U1.23 ; U5.7 U5.2 U5.3 v1(20.882,30.726) ; C16.1 v1(22.032,30.726) ; U1.47 22.25,12.063 22.55,12.363 v1(22.55,12.4) ; v1(22.4,25.851) 22.4,25.822 22.832,25.39 U8.2 ; v1(22.925,16.005) 22.933,16.013 U1.8 ; v1(23.8,11.5) 24.44,11.5 C11.1 ; C8.1 25.375,9.748 C7.1 v1(26.3,9.1) ; C22.1 C9.1 28.999,14.78 29.76,14.78 v1(29.8,14.82) ; U6.4 28.239,23.77 v1(28.367,23.642) ; C18.1 v1(29.724,27.433) ; v1(29.3,18.3) 29.306,18.294 30.034,18.294 C4.1 ; v1(31.939,21.531) U10.1@32.739,21.531 ; v1(32.4,18) 32.457,17.943 32.457,17.516 33.218,16.755 X2.2 ; U10.1 U10.1@32.739,21.531 ; U10.2 33.239,20.713 33.063,20.537 32.88,20.537 32.739,20.678 U10.1@32.739,21.531 ; v1(34.239,24.751) U10.7 ; C21.1 36.673,24.992 v1(37.119,24.546)
  Layer 1 w0.5: v1(3.2,16.1) 3.289,16.1 3.308,16.081 3.308,15.192 3.475,15.025 U3.3 ; v1(3.4,4.4) 4.062,3.738 4.062,2.25 P2.6 ; R12.1 7.875,15.675 v1(7.9,15.7) ; v1(10,5.662) 10.012,5.65 P2.5 ; C1.1 30.533,10.76 ; C2.1 30.468,11.995 X2.4@30.818,12.345 ; v1(30.8,11) 30.818,11.018 X2.4@30.818,12.345 ; X2.4 X2.4@30.818,12.345
  Layer 1 w1: P5.2 v1(33.8,1.9)
  Layer 4 w0.3: P8.4 16.725,2.2 17.325,1.6 v1(18.2,1.6) ; P8.2 19.043,8.012 19.393,8.362 v1(20,8.362) ; P8.3 24.387,2.213 v1(24.8,1.8)
  Layer 4 w0.5: BT1.2 35.539,16.1 v1(36.9,16.1)
I2C1_SCL: P7.3 R5.1 R8.1 U5.4 U7.2 U9.1 U10.5 | length 48.8
  Layer 1 w0.2: U7.2 9.075,31.175 8.25,32 U9.1 8.25,32.4 8.842,32.992 17.758,32.992 18.982,31.768 ; U5.4 18.982,31.768 ; R8.1@27.125,21.313 R5.1@27.975,21.313 ; R8.1 27.19,22.124 27.211,22.124 v1(27.329,22.241) ; v1@27.25,22.25 29,22.25 31.25,20 34.633,20 ; v1(27.25,29.75) 25.232,31.768 18.982,31.768 ; U10.5 34.75,21.539 34.75,20.117 34.633,20 ; P7.3 37.615,17.018 34.633,20
  Layer 4 w0.2: v1(27.25,29.75) 27.264,29.736 v1@27.264,22.236
I2C1_SDA: P7.4 R6.1 R9.1 U5.6 U7.3 U9.6 U10.4 | length 46.1
  Layer 1 w0.2: U9.6 8.25,30.6 9.4,29.45 U7.3@9.675,29.45 ; U7.3 9.825,29.25 9.825,28.867 9.942,28.75 11.049,28.75 13.349,31.05 16.55,31.05 18.699,28.901 18.957,28.901 19.007,28.851 19.132,28.851 19.777,28.206 26.456,28.206 v1(26.5,28.25) ; R6.1@25.375,21.313 R9.1@26.275,21.313 ; R9.1 26.168,21.904 26.393,22.129 v1@26.393,22.345 ; v1@26.5,22.358 26.5,22.379 27.021,22.9 34.089,22.9 34.239,22.75 ; U10.4 34.239,22.75 ; P7.4 37.718,18.288 35.368,20.639 35.368,22.241 34.858,22.75 34.239,22.75
  Layer 4 w0.2: v1@26.5,22.25 26.064,22.686 26.064,25.25 26.5,25.686 v1(26.5,28.25)
  other v1: 26.393,22.237
I_MEAS: U1.14 U6.5 | length 15.8
  Layer 1 w0.2: U1.14 22.25,18.558 22.5,18.308 v1(22.5,18.2) ; U6.5 30.853,24.34 31.925,24.34 v1(31.939,24.355)
  Layer 4 w0.2: v1(22.5,18.2) 24.902,18.2 25.2,18.498 25.2,20.663 25.837,21.3 28.884,21.3 v1(31.939,24.355)
LED_Gn: R13.2 U1.25 | length 28.4
  Layer 1 w0.2: U1.25 15.76,18.003 16.937,18.003 v1(16.948,17.993) ; v1(17.058,4.839) 17.128,4.839 18.167,3.8 27.99,3.8 28.14,3.95 29.1,3.95 29.517,4.368 29.542,4.368 29.717,4.543 R13.2
  Layer 4 w0.2: v1(16.948,17.993) 17,17.94 17,16.6 17.734,15.866 17.734,6.624 17.058,5.948 v1(17.058,4.839)
LED_Rn: R11.2 U1.27 | length 26.8
  Layer 1 w0.2: U1.27 17.585,17.013 18.049,16.549 v1(18.15,16.549) ; v1(18.048,5.234) 18.048,5.152 19,4.2 27.824,4.2 27.974,4.35 28.249,4.35 29.517,5.618 29.542,5.618 29.717,5.793 R11.2
  Layer 4 w0.2: v1(18.048,5.234) 18.124,5.31 18.124,5.526 18.149,5.551 v1(18.15,16.549)
MCU_DEBUG_RX: P3.2 U1.31 | length 4.5
  Layer 1 w0.2: P3.2 12,15.079 12.608,14.471 12.666,14.413 13.619,14.413 ccw(c11.753,16.573) 13.913,14.707 14.219,15.013 U1.31
MCU_DEBUG_TX: P3.3 U1.30 | length 2.8
  Layer 1 w0.2: P3.3 13.485,15.628 13.498,15.65 13.543,15.727 14.862,15.727 15.026,15.563 15.7,15.563 U1.30
NetC1_2: C1.2 U1.3 X1.1 | length 7.6
  Layer 1 w0.2: U1.3 25.618,13.513 26.118,13.013 26.118,12.232 26.8,11.55 26.8,10.618 27.2,10.218 X1.1 27.758,10.06 29.11,10.06 C1.2
NetC2_2: C2.2 U1.4 X1.2 | length 5.7
  Layer 1 w0.2: U1.4 25.905,14.013 27.2,12.718 X1.2 27.797,12.915 C2.2
NetC3_2: C3.2 U1.5 X2.1 | length 11.6
  Layer 1 w0.2: U1.5 25.971,14.513 26.828,13.655 31.818,13.655 32.218,13.255 32.718,13.255 33.218,12.755 33.218,12.54 X2.1 33.303,12.54 C3.2
NetC4_2: C4.2 U1.6 X2.3 | length 10.9
  Layer 1 w0.2: U1.6 24.263,15 26.138,15 27.018,14.12 30.42,14.12 30.818,14.518 X2.3 30.818,18.146 C4.2
NetC12_2: C12.2 D3.2 D4.2 U3.2 | length 8.4
  Layer 1 w0.5: C12.2 2.451,19.099 U3.2 U3.2 2.45,14.039 3.145,13.344 D4.2 D3.2
NetC13_2: C13.2 D1.1 Q1.1 R12.2 U3.1 | length 6.8
  Layer 1 w0.5: C13.2 4.351,19.099 U3.1 U3.1 D1.1@6.01,17.475 ; R12.2 6.195,15.695 6.195,17.155 D1.1 6.258,17.218 6.258,19.058 Q1.1
NetC22_2: C22.2 L1.2 U1.9 | length 5.1
  Layer 1 w0.3: U1.9 25.038,16.513 25.908,17.383 26.157,17.383 26.54,17 L1.2 ; L1.2@27.725,16.6 27.8,16.525 C22.2
NetD2_2: D2.2 R11.1 | length 1.4
  Layer 1 w0.3: R11.1 30.791,5.694 D2.2
NetD2_4: D2.4 R13.1 | length 1.4
  Layer 1 w0.3: R13.1 30.794,4.694 D2.4
NetP2_2: P2.2 R3.2 U2.1 | length 6.2
  Layer 1 w0.3: R3.2 7.3,9.325 7.3,7.8 8.05,7.05 U2.1 8.062,6.788 P2.2
NetP2_3: P2.3 R4.2 U2.3 | length 6.3
  Layer 1 w0.3: P2.3 8.712,5.512 9.35,6.15 U2.3 10.012,7.462 10.012,9.613 R4.2
NetP6_2: P6.2 R20.1 R21.1 | length 4.4
  Layer 1 w0.2: R21.1 33.064,29.801 33.539,29.326 33.664,29.326 34.039,28.951 34.039,28.701 R20.1
  Layer 1 w1: R21.1 33.064,32.334 P6.2
NetP6_3: P6.3 R21.2 R22.1 | length 5
  Layer 1 w0.2: R22.1 30.014,28.701 30.014,28.751 30.627,29.364 30.889,29.364 31.364,29.839 R21.2
  Layer 1 w1: P6.3 30.584,30.706 R21.2
NetR8_2: R8.2 U1.42 | length 23.5
  Layer 1 w0.2: U1.42 19.75,9.505 21.455,7.8 26.104,7.8 26.654,7.25 v1(27.5,7.25) ; R8.2 27.19,19.63 27.556,19.263 v1(27.565,19.263)
  Layer 4 w0.2: v1(27.5,7.25) v1@27.5,19.258
NetR9_2: R9.2 U1.43 | length 21
  Layer 1 w0.2: U1.43 20.25,9.571 21.571,8.25 v1(26.75,8.25) ; R9.2 26.168,19.712 v1(26.393,19.487)
  Layer 4 w0.2: v1@26.5,19.5 26.5,19.392 27.052,18.84 27.052,8.769 26.827,8.544 26.827,8.327 v1(26.75,8.25)
NetR23_2: R23.2 R25.1 U6.3 U8.1 | length 5.6
  Layer 1 w0.2: U8.1 23.913,23.496 R23.2 25.476,23.513 R25.1 26.424,24.597 26.803,24.976 U6.3
NetR24_1: R24.1 U6.2 | length 1.4
  Layer 1 w0.2: R24.1 26.868,25.626 U6.2
NetR26_2: R26.2 R27.1 | length 0.7
  Layer 1 w0.3: R27.1 R26.2
NetR29_2: R29.2 U10.8 | length 4.2
  Layer 1 w0.2: U10.8 33.739,27.122 34.117,27.5 34.75,27.5 35.068,27.818 R29.2
PA15: P1.5 U1.38 | length 34.3
  Layer 1 w0.2: P1.5 2.953,29.847 4.85,27.95 12.25,27.95 v1(13.4,29.1) ; U1.38 17.75,12.009 17.867,12.126 18.526,12.126 v1(18.8,12.4)
  Layer 4 w0.2: v1(13.4,29.1) 13.4,22.99 15.928,20.463 15.928,20.427 17.542,18.813 17.542,18.077 17.548,18.071 17.548,18.052 18.8,16.8 v1(18.8,12.4)
PH3: P1.6 R7.2 U1.44 | length 38.5
  Layer 1 w0.2: P1.6 2.483,31.117 4.575,29.025 R7.2 5.875,28.85 5.9,28.85 6.4,28.35 11.228,28.35 13.528,30.65 16.384,30.65 19.966,27.068 19.966,26.687 v1(20,26.653) ; v1(20.7,12.4) 20.725,12.375 20.725,11.038 U1.44
  Layer 4 w0.2: v1(20,26.653) 20.8,25.853 20.8,12.7 20.777,12.677 20.777,12.477 v1(20.7,12.4)
RESET: P4.5 R1.1 U1.7 | length 28.9
  Layer 1 w0.2: v1(23,15) 23.494,15.494 24.231,15.494 U1.7 25.713,15.513 R1.1 ; v1(24.461,5.523) 24.784,5.2 27.534,5.2 31.374,9.04 P4.5
  Layer 4 w0.2: v1(23,15) 24.461,13.539 v1(24.461,5.523)
SENS_I_+: C17.2 R20.2 U6.7 U10.10 | length 5.6
  Layer 1 w0.2: U6.7 30.964,25.751 31.522,25.751 32.517,26.747 ; U10.10 32.739,26.525 32.517,26.747 ; R20.2 C17.2 32.517,26.747
SENS_I_-: C17.1 R22.2 U6.8 U10.9 | length 12.1
  Layer 1 w0.2: R22.2 C17.1 31.597,27.523 30.839,26.764 U6.8 30.064,26.276 29.614,25.826 29.614,24.024 29.979,23.659 32.259,23.659 33.239,24.639 U10.9
SENS_V: P6.1 R26.1 R29.1 | length 3.3
  Layer 1 w0.3: R29.1 R26.1 36.014,32.044 P6.1
SPI2_MOSI: P1.4 U1.28 | length 20.5
  Layer 1 w0.2: v1(13.8,16.5) 13.806,16.506 15.744,16.506 U1.28
  Layer 4 w0.2: P1.4 3.823,28.577 13.8,18.6 v1(13.8,16.5)
SPI2_SCK: P1.3 U1.26 | length 18.9
  Layer 1 w0.2: v1(13,17.5) 13.006,17.506 15.744,17.506 U1.26
  Layer 4 w0.2: P1.3 4.126,27.307 13,18.433 v1(13,17.5)
SWCLK: P4.4 U1.37 | length 26.4
  Layer 1 w0.2: U1.37 17.25,8.879 20.329,5.8 23,5.8 24.1,4.7 27.6,4.7 30.67,7.77 P4.4
SWDIO: P4.1 U1.34 | length 36.4
  Layer 1 w0.2: U1.34 15.756,13.519 16.864,13.519 v1(16.951,13.606) ; v1(19,1.8) 20.004,1.8 20.804,1 25.025,1 27.225,3.2 27.956,3.2 28.306,3.55 38.09,3.55 P4.1
  Layer 4 w0.2: v1(16.951,13.606) 16.951,13.57 16.282,12.901 16.282,4.518 16.587,4.213 18.087,4.213 18.42,3.88 19,3.3 v1(19,1.8)
SWO: P4.6 U1.39 | length 25.5
  Layer 1 w0.2: U1.39 18.25,8.445 20.495,6.2 25.124,6.2 27.969,6.2 32.079,10.31 P4.6
USB_N: R3.1 U1.32 | length 9.8
  Layer 1 w0.2: 13.887,13.758 14.642,14.513 U1.32
  Layer 1 w0.6: R3.1 7.999,10.875 8.35,11.226 8.35,12.096 9.301,13.048 12.858,13.048 13.623,13.813 13.832,13.813
USB_P: R4.1 U1.33 | length 8.5
  Layer 1 w0.2: 14.08,13.017 15.026,13.963 15.7,13.963 U1.33
  Layer 1 w0.6: R4.1 9.601,10.875 9.25,11.226 9.25,11.724 9.674,12.148 13.23,12.148 14.09,13.008
USB_SENSE: R2.1 R30.2 U1.10 | length 26.2
  Layer 1 w0.2: R30.2 R2.1 12.025,7.775 14.3,5.5 16.912,5.5 17.422,6.01 18.54,6.01 19.171,5.379 21.741,5.379 v1(22,5.12) ; v1(22.771,16.945) 22.833,17.006 24.244,17.006 U1.10
  Layer 4 w0.2: v1(22,5.12) 21.95,5.17 21.95,15.514 22.325,15.889 22.325,16.253 22.75,16.679 22.75,16.924 v1(22.771,16.945)
V_MEAS: R27.2 R28.1 U1.15 | length 24.7
  Layer 1 w0.2: U1.15 21.775,19.488 21.775,17.775 v1(21.756,17.756) ; R27.2 R28.1 37,27.465 v1(37,26.4)
  Layer 4 w0.2: v1(21.756,17.756) 21.912,17.6 24.871,17.6 25.6,18.329 25.6,20.463 25.975,20.838 32.563,20.838 36.986,25.261 36.986,26.386 v1(37,26.4)
VDD: C5.2 C6.2 C7.2 C8.2 C9.2 C10.2 C11.2 D1.2 D2.1 D2.3 L1.1 P1.1 P4.3 Q1.2 R1.2 S1.1 S1.2 U1.1 U1.24 U1.36 U1.48 | length 26.7
  Layer 1 w0.3: v1(14.385,7) S1.2 ; v1(14.8,18.9) C5.2 14.885,19.728 C6.2 16.415,19.513 U1.24 ; v1(15.675,10.5) C10.2 15.675,12.438 U1.36 ; U1.48 23.19,11.013 C8.2 23.84,9.285 C7.2 v1(23,9.1) ; S1.1 v1(25.618,7) ; U1.1 25.187,12.513 25.46,12.24 C11.2 26.06,11 v1(26.075,11) ; v1(26.076,16.455) 26.3,16.455 26.625,16.13 26.625,15.725 R1.2 ; v1(28.3,18.1) 28.3,18.093 28.619,17.774 28.619,17.591 28.86,17.35 28.869,17.35 29.169,17.05 L1.1 ; C9.2 28.959,16.484 L1.1@29.075,16.6 ; D2.3 34.4,4.7 35.139,4.7 35.639,5.2 v1(35.7,5.2) 35.356,5.544 34.544,5.544 D2.1
  Layer 1 w0.5: Q1.2 8.2,18.9 9.28,17.82 9.28,17.38 D1.2 9.66,17 v1(10.396,17)
VDD_FLASH: C14.2 C15.2 C23.2 U1.21 U1.22 U4.8 | length 19
  Layer 1 w0.3: U1.22 18.25,20.65 18.5,20.9 18.75,20.65 U1.21
  Layer 1 w0.5: U4.8 14.733,27.307 C15.2 14.833,27.193 14.833,26.007 C14.2
  Layer 1 w0.75: C15.2@14.733,27.307 14.733,28.483 14.75,28.5 v1(14.75,29.551) ; 18.5,20.9 18.5,21.25 18.525,21.275 v1(18.534,21.275)
  Layer 4 w0.75: v1(14.75,29.551) 14.75,26.5 18.514,22.736 18.514,21.296 v1(18.534,21.275)
VDD_SENSORS_FAST: C18.2 C19.2 C20.2 C21.2 R23.1 R24.2 U1.45 U1.46 U6.1 U7.1 U9.5 U10.6 | length 19.1
  Layer 1 w0.3: U9.5 7.775,30.775 7.775,30.301 8.04,30.036 8.04,29.67 8.603,29.107 8.785,29.107 v1(8.842,29.05) ; U7.1 10.73,31.195 10.73,32.23 C19.2 v1(11.619,32.25) ; U1.45 21.25,10.05 21.4,9.9 21.574,9.9 21.75,10.076 21.75,11.721 21.571,11.9 21.571,12.333 21.6,12.363 ; R23.1 25.584,22.671 25.704,22.671 26.664,23.631 v1(26.664,23.642) ; U10.6 34.739,25.912 C21.2 v1(35.962,26.608)
  Layer 1 w0.5: v1(21.45,15.863) 21.45,14.597 21.6,14.447 21.6,12.363 ; R24.2 26.836,26.885 27.384,27.433 C18.2 ; v1(28.234,28.25) 28.234,27.491 C18.2 ; 28.239,26.501 28.239,27.37 C18.2
VDD_SENSORS_SLOW: C16.2 P7.1 R5.2 R6.2 U1.40 U1.41 U5.1 | length 31.4
  Layer 1 w0.3: U1.40 18.75,10.218 18.926,10.043 19.1,10.043 19.25,10.193 U1.41 19.25,11.758 19.682,12.19 ; U5.1 20.892,28.866 C16.2 v1(22.832,28.866) ; v1(22.523,22.821) 23.308,22.036 23.308,21.493 24.438,20.363 R6.2@25.227,20.363 ; R6.2 R6.2@25.227,20.363 ; R6.2@25.375,20.363 R6.2@25.227,20.363 ; R5.2 28.219,20.363 28.344,20.238 28.344,20.213 28.5,20.057 28.5,19.426 ; P7.1 37.359,14.478 32.411,19.426 28.5,19.426 ; R6.2@25.227,20.363 25.227,19.581 26.195,18.613 27.834,18.613 28.5,19.279 28.5,19.426
  Layer 1 w0.5: 19.682,12.19 v1(19.682,15.863)
pads on no net: P2.4 U1.29 U2.4 U5.5 U6.6 U8.3 U9.3 U10.3

## Polygon pours and split planes (outlines as drawn)
GND on Layer 4 "GND_L04_P001" (solid, remove dead copper, pour order 1): 1,0 cw(c1,1) 0,1 0,33 cw(c1,33) 1,34 39,34 cw(c39,33) 40,33 40,1 cw(c39,1) 39,0
GND on Layer 1 "GND_L01_P000" (solid, remove dead copper, pour order 0): 1,0 cw(c1,1) 0,1 0,33 cw(c1,33) 1,34 39,34 cw(c39,33) 40,33 40,1 cw(c39,1) 39,0
GND on Layer 2 - GND (split plane): 39.096,33.482 39.188,33.454 39.273,33.409 39.348,33.348 39.409,33.273 39.454,33.188 39.482,33.096 39.491,33.012 39.49,33 39.49,1 39.491,0.988 39.482,0.904 39.454,0.812 39.409,0.727 39.348,0.652 39.273,0.591 39.188,0.546 39.096,0.518 39.012,0.509 39,0.51 1,0.51 0.988,0.509 0.904,0.518 0.812,0.546 0.727,0.591 0.652,0.652 0.591,0.727 0.546,0.812 0.518,0.904 0.509,0.988 0.51,1 0.51,33 0.509,33.012 0.518,33.096 0.546,33.188 0.591,33.273 0.652,33.348 0.727,33.409 0.812,33.454 0.904,33.482 0.988,33.491 1,33.49 39,33.49 39.012,33.491
EXT_BAT on Layer 3 - PWR (split plane): 13.112,6.217 13.145,6.195 13.184,6.187 26.619,6.187 28.898,3.908 28.898,0.51 1,0.51 0.988,0.509 0.904,0.518 0.812,0.546 0.727,0.591 0.652,0.652 0.591,0.727 0.546,0.812 0.518,0.904 0.509,0.988 0.51,1 0.51,12.398 6.931,12.398
VDD_SENSORS_FAST on Layer 3 - PWR (split plane): 39.096,33.482 39.188,33.454 39.273,33.409 39.348,33.348 39.409,33.273 39.454,33.188 39.482,33.096 39.491,33.012 39.49,33 39.49,18.94 25.805,18.94 25.766,18.932 25.733,18.91 21.637,14.815 20.576,14.815 20.576,17.332 24.672,21.428 24.694,21.461 24.702,21.5 24.702,29.201 24.694,29.24 24.672,29.273 24.123,29.822 24.09,29.844 24.051,29.852 20.164,29.852 20.125,29.844 20.092,29.822 17.704,27.434 17.682,27.401 17.674,27.362 17.674,21.384 13.499,25.559 13.466,25.581 13.427,25.589 0.51,25.589 0.51,33 0.509,33.012 0.518,33.096 0.546,33.188 0.591,33.273 0.652,33.348 0.727,33.409 0.812,33.454 0.904,33.482 0.988,33.491 1,33.49 39,33.49 39.012,33.491
VDD on Layer 3 - PWR (split plane): 18.698,20.072 18.698,15.182 18.706,15.143 18.728,15.11 19.197,14.641 19.231,14.619 19.27,14.611 21.679,14.611 21.718,14.619 21.751,14.641 25.847,18.736 39.49,18.736 39.49,1 39.491,0.988 39.482,0.904 39.454,0.812 39.409,0.727 39.348,0.652 39.273,0.591 39.188,0.546 39.096,0.518 39.012,0.509 39,0.51 29.102,0.51 29.102,3.95 29.094,3.989 29.072,4.022 26.733,6.361 26.7,6.383 26.661,6.391 13.226,6.391 7.045,12.572 7.012,12.594 6.973,12.602 0.51,12.602 0.51,25.385 13.385,25.385
VDD_SENSORS_SLOW on Layer 3 - PWR (split plane): 24.498,29.159 24.498,21.542 20.402,17.446 20.38,17.413 20.372,17.374 20.372,14.815 19.312,14.815 18.902,15.225 18.902,20.114 18.894,20.153 18.872,20.186 17.878,21.18 17.878,27.32 20.206,29.648 24.009,29.648

## Other copper
Layer 3 - PWR (plane layer: these items are gaps in the copper):
  lines w0.2: 0,12.75 0.25,12.5 6.973,12.5 13.184,6.289 26.661,6.289 29,3.95 29,0 31.75,0 ; 0.2,22.6 0.2,25.487 13.427,25.487 18.8,20.114 18.8,15.182 19.27,14.713 21.679,14.713 25.805,18.838 40.1,18.838 ; 17.776,21.138 17.776,27.362 20.164,29.75 24.051,29.75 24.6,29.201 24.6,21.5 20.474,17.374 20.474,14.713

## Silkscreen, mask and mechanical layers (free items; w line width, h text height)
Top Overlay:
  circle w2: c19.932,29.564 r3
  text "V" at 37.458,31.799 h1
  text "G" at 27.689,29.9 h1
  text "I" at 29.785,29.9 h1
  text "I2C" at 37.319,14 h1 r90
  text "UART" at 10.7,13.3 h1
  text "Prog" at 36.986,3.572 h1 r90
  text "+     -" at 27.3,0.5 h1
Bottom Overlay:
  text "'.PROJ_Title' / Rev '.PROJ_Revision'" at 38.5,26 h1.2
Board outline:
  the board outline again, w0.1
Drill Drawing:
  circle w0.254: c3.656,57.2 r0.847
  lines w0.254: 2.809,54.237 4.503,54.237 3.656,52.543 2.809,54.237 ; 2.809,60.163 4.503,60.163 4.503,61.857 2.809,61.857 2.809,60.163 ; 2.809,64.397 3.233,64.397 3.656,63.973 4.079,64.397 4.503,64.397 4.079,64.82 4.503,65.243 4.079,65.243 3.656,65.667 3.233,65.243 2.809,65.243 3.233,64.82 2.809,64.397
  lines w0.381: 1.291,51.4 145.372,51.4 ; 1.291,66.64 145.372,66.64 ; 15.283,47.59 15.283,70.45 ; 30.265,47.59 30.265,70.45 ; 48.599,47.59 48.599,70.45 ; 61.448,47.59 61.448,70.45 ; 80.086,47.59 80.086,70.45 ; 110.304,47.59 110.304,70.45 ; 125.286,47.59 125.286,70.45 ; 1.291,47.59 145.372,47.59 145.372,70.45 1.291,70.45 1.291,47.59
  text "Symbol" at 3.577,67.783 h1.83
  text "Count" at 16.426,67.783 h1.83
  text "Hole Size" at 31.408,67.783 h1.83
  text "Plated" at 49.742,67.783 h1.83
  text "Hole Type" at 62.591,67.783 h1.83
  text "Drill Layer Pair" at 81.229,67.783 h1.83
  text "Via/Pad" at 111.447,67.783 h1.83
  text "Pad Shape" at 126.429,67.783 h1.83
  text "111" at 16.426,63.973 h1.52
  text "0,300mm" at 31.408,63.973 h1.52
  text "PTH" at 49.742,63.973 h1.52
  text "Round" at 62.591,63.973 h1.52
  text "Layer 1 - Layer 4" at 81.229,63.973 h1.52
  text "Via" at 111.447,63.973 h1.52
  text "Rounded" at 126.429,63.973 h1.52
  text "19" at 16.426,60.163 h1.52
  text "0,700mm" at 31.408,60.163 h1.52
  text "PTH" at 49.742,60.163 h1.52
  text "Round" at 62.591,60.163 h1.52
  text "Layer 1 - Layer 4" at 81.229,60.163 h1.52
  text "Pad" at 111.447,60.163 h1.52
  text "(Mixed)" at 126.429,60.163 h1.52
  text "4" at 16.426,56.353 h1.52
  text "1,000mm" at 31.408,56.353 h1.52
  text "PTH" at 49.742,56.353 h1.52
  text "Round" at 62.591,56.353 h1.52
  text "Layer 1 - Layer 4" at 81.229,56.353 h1.52
  text "Pad" at 111.447,56.353 h1.52
  text "(Mixed)" at 126.429,56.353 h1.52
  text "2" at 16.426,52.543 h1.52
  text "2,300mm" at 31.408,52.543 h1.52
  text "PTH" at 49.742,52.543 h1.52
  text "Round" at 62.591,52.543 h1.52
  text "Layer 1 - Layer 4" at 81.229,52.543 h1.52
  text "Pad" at 111.447,52.543 h1.52
  text "Rounded" at 126.429,52.543 h1.52
  text "136 Total" at 16.426,48.733 h1.52

## Text inside footprints (layer, text, board x,y; h text height)
BT1: Bottom Overlay "+" at 2.239,17.9 h1.52 r180; Bottom Overlay "-" at 37.839,17.6 h1.52 r90
D1: Assembly top "A" at 5.862,16.568 h0.7
D3: Assembly top "A" at 6.25,9.709 h0.7 r90
D4: Assembly top "A" at 4.05,9.709 h0.7 r90